# Allegro board Shield.brd
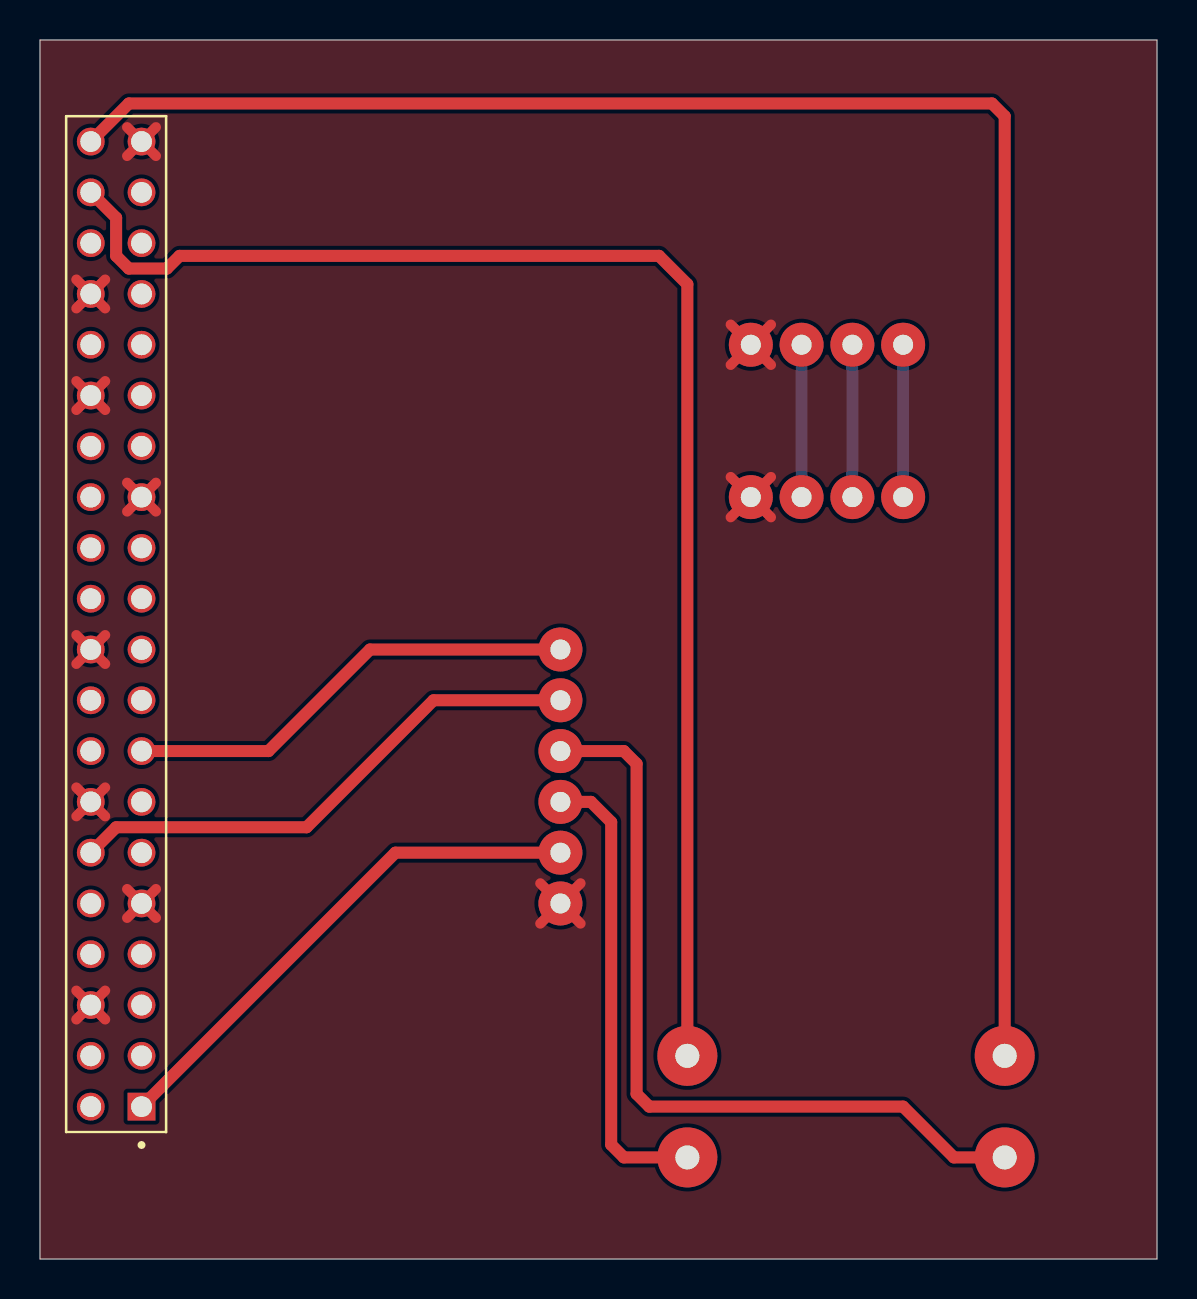
[diagram p0: board, top side]
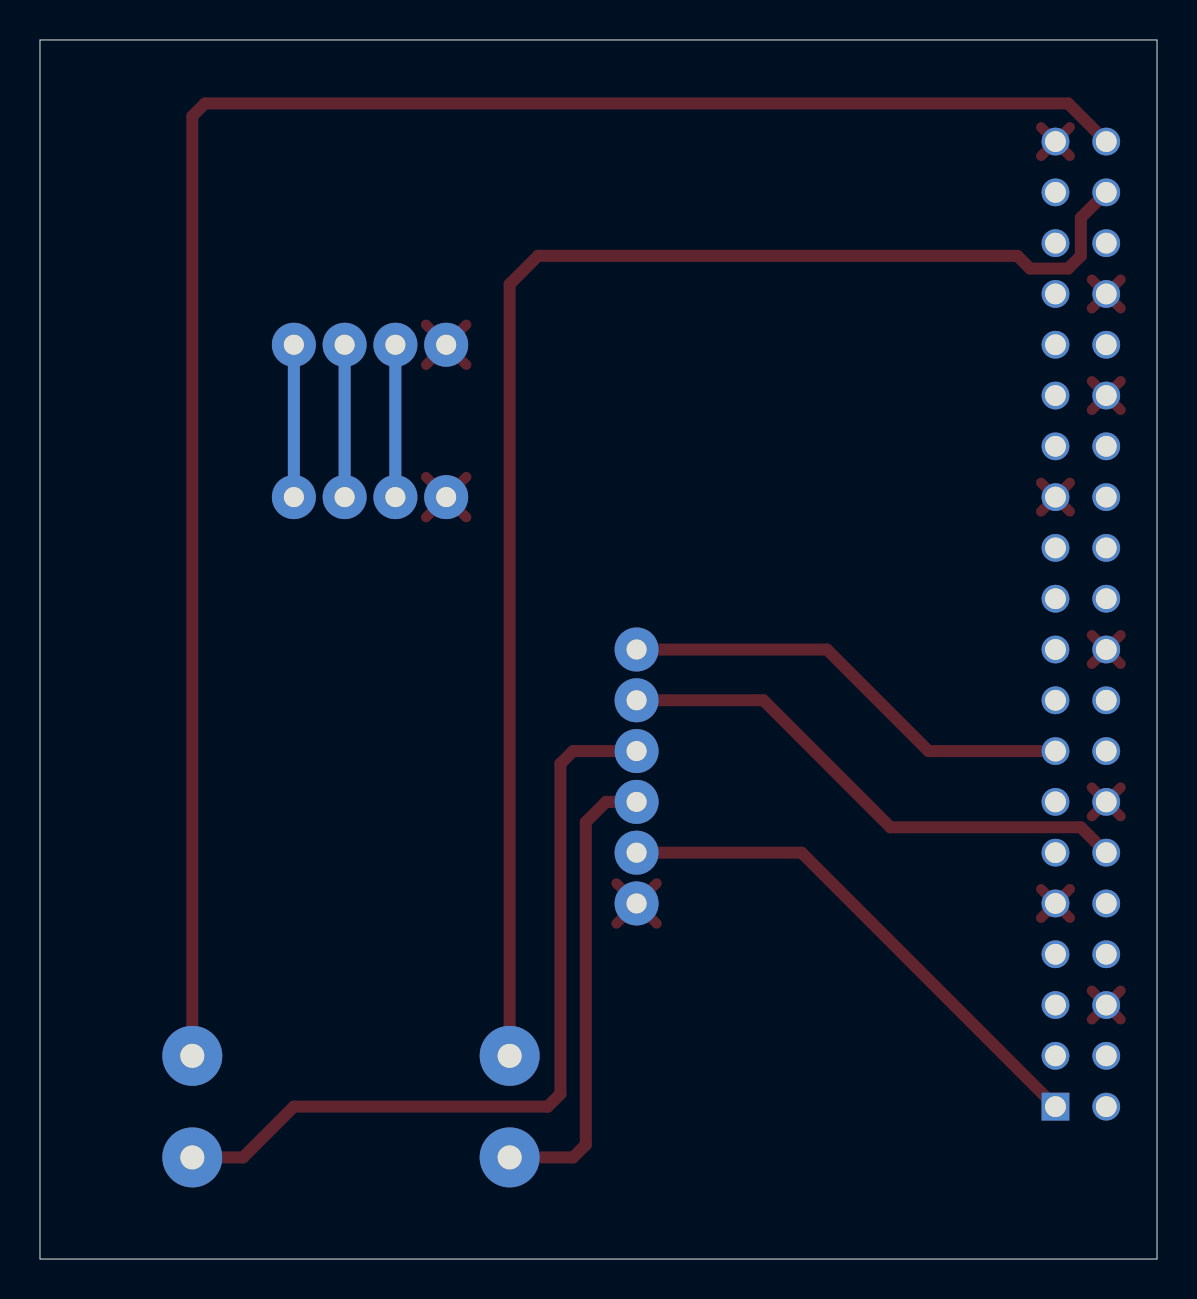
[diagram p1: board, bottom side, seen from below]

Outline 55.88 x 60.96 mm; copper layers: TOP, BOTTOM. Coordinates in mm from the lower left corner of the outline.
Outline path: 0,60.96 0,0 55.88,0 55.88,60.96 0,60.96

## Design rules (mm)
constraint set DEFAULT: min track width 0.6

## Placement (name value [footprint] x y rotation side)
ANT  CON1  [CON_01]  48.26 5.08 0 top
ANT_GPIO  CON1  [CON_01]  48.26 10.16 0 top
BU  CON1  [CON_01]  32.38 5.08 0 top
BU_GPIO  CON1  [CON_01]  32.38 10.16 0 top
GPS  GPS  [CON_06]  26.04 17.78 90 top
IMU  CON4  [CON_04]  35.56 38.1 0 top
RASP  CON40A  [TE_2-828221-0]  5.08 7.62 90 top
USB  CON4  [CON_04]  35.56 45.72 0 top

## Library data of the parts
ANT ANT_GPIO BU BU_GPIO = CON1
GPS = CON6
IMU USB = CON4
RASP = CON40A

## Footprints (pads in the part's own frame, mm; a bottom-side part is the same pattern mirrored in y, then rotated)
CON_01
  round 3 hole 1.2: 1(0,0)
CON_04
  round 2.2 hole 1: 1(0,0) 2(2.54,0) 3(5.08,0) 4(7.62,0)
CON_06
  round 2.2 hole 1: 1(0,0) 2(2.54,0) 3(5.08,0) 4(7.62,0) 5(10.16,0) 6(12.7,0)
TE_2-828221-0
  rect 1.39x1.39 hole 1.04: 1(0,0)
  round 1.39 hole 1.04: 2(0,2.54) 3(2.54,0) 4(2.54,2.54) 5(5.08,0) 6(5.08,2.54) 7(7.62,0) 8(7.62,2.54) 9(10.16,0) 10(10.16,2.54) 11(12.7,0) 12(12.7,2.54) 13(15.24,0) 14(15.24,2.54) 15(17.78,0) 16(17.78,2.54) 17(20.32,0) 18(20.32,2.54) 19(22.86,0) 20(22.86,2.54) 21(25.4,0) 22(25.4,2.54) 23(27.94,0) 24(27.94,2.54) 25(30.48,0) 26(30.48,2.54) 27(33.02,0) 28(33.02,2.54) 29(35.56,0) 30(35.56,2.54) 31(38.1,0) 32(38.1,2.54) 33(40.64,0) 34(40.64,2.54) 35(43.18,0) 36(43.18,2.54) 37(45.72,0) 38(45.72,2.54) 39(48.26,0) 40(48.26,2.54)

## Nets
5V: RASP.2
VCC: GPS.2 RASP.1
VCC(IMU): IMU.4 USB.4
0: GPS.1 IMU.1 RASP.6 RASP.9 RASP.14 RASP.20 RASP.25 RASP.30 RASP.34 RASP.39 USB.1
ANT: ANT.1 GPS.4
ANT_GPIO: ANT_GPIO.1 RASP.40
BACKUP: BU.1 GPS.3
BACKUP_GPIO: BU_GPIO.1 RASP.38
RX(GPS): GPS.6 RASP.15
RX(IMU): IMU.3 USB.3
TX(GPS): GPS.5 RASP.12
TX(IMU): IMU.2 USB.2
N15150: RASP.17

Pads without a net: RASP 3 4 5 7 8 10 11 13 16 18 19 21 22 23 24 26 27 28 29 31 32 33 35 36 37

## Routing (per net, layer and track width the routed paths; a pad name or vN(x,y) marks a point on that pad's centre or on a via; arc(x,y) is an arc through that point)
VCC: length 26.2
  TOP w0.6: RASP.1 17.78,20.32 GPS.2
VCC(IMU): length 7.6
  BOTTOM w0.6: IMU.4 USB.4
0: length 49.6
  TOP w0.508: 34.55,37.09 IMU.1 ; IMU.1 36.57,39.11 ; IMU.1 36.57,37.09 ; IMU.1 34.55,39.11 ; 34.55,44.71 USB.1 ; USB.1 34.55,46.73 ; USB.1 36.57,46.73 ; USB.1 36.57,44.71 ; RASP.14 3.26,22.14 ; RASP.14 1.82,22.14 ; RASP.14 3.26,23.58 ; RASP.14 1.82,23.58 ; RASP.34 3.26,47.54 ; RASP.34 3.26,48.98 ; RASP.34 1.82,47.54 ; RASP.34 1.82,48.98 ; 25.03,16.77 GPS.1 ; GPS.1 27.04,18.79 ; GPS.1 25.03,18.79 ; GPS.1 27.04,16.77 ; 1.82,29.76 RASP.20 ; RASP.20 3.26,29.76 ; RASP.20 1.82,31.2 ; RASP.20 3.26,31.2 ; RASP.25 5.8,37.38 ; RASP.25 4.36,38.82 ; RASP.25 4.36,37.38 ; RASP.25 5.8,38.82 ; 4.36,18.5 RASP.9 ; RASP.9 5.8,17.06 ; RASP.9 5.8,18.5 ; RASP.9 4.36,17.06 ; 4.36,55.16 RASP.39 ; RASP.39 4.36,56.6 ; RASP.39 5.8,56.6 ; RASP.39 5.8,55.16 ; 1.82,13.42 RASP.6 ; RASP.6 1.82,11.98 ; RASP.6 3.26,13.42 ; RASP.6 3.26,11.98 ; 1.82,43.9 RASP.30 ; RASP.30 3.26,42.46 ; RASP.30 3.26,43.9 ; RASP.30 1.82,42.46
ANT: length 40.3
  TOP w0.6: GPS.4 29.21,25.4 29.84,24.77 29.84,8.26 30.48,7.62 43.18,7.62 45.72,5.08 ANT.1
ANT_GPIO: length 93.8
  TOP w0.6: RASP.40 4.45,57.79 47.62,57.79 48.26,57.15 ANT_GPIO.1
BACKUP: length 23.2
  TOP w0.6: BU.1 29.21,5.08 28.57,5.72 28.57,21.85 27.56,22.86 GPS.3
BACKUP_GPIO: length 72
  TOP w0.6: RASP.38 3.81,52.07 3.81,50.16 4.45,49.53 6.35,49.53 6.99,50.16 30.97,50.16 32.38,48.75 BU_GPIO.1
RX(GPS): length 23.1
  TOP w0.6: RASP.15 11.43,25.4 16.51,30.48 GPS.6
RX(IMU): length 7.6
  BOTTOM w0.6: IMU.3 USB.3
TX(GPS): length 26.7
  TOP w0.6: RASP.12 3.81,21.59 13.34,21.59 19.68,27.94 GPS.5
TX(IMU): length 7.6
  BOTTOM w0.6: IMU.2 USB.2

## Copper pours and planes (outline as drawn; the poured copper is in the pictures)
0 on TOP: 0,60.96 0,0 55.88,0 55.88,60.96
